# EAGLE board X2 (EAGLE 6.6.0)
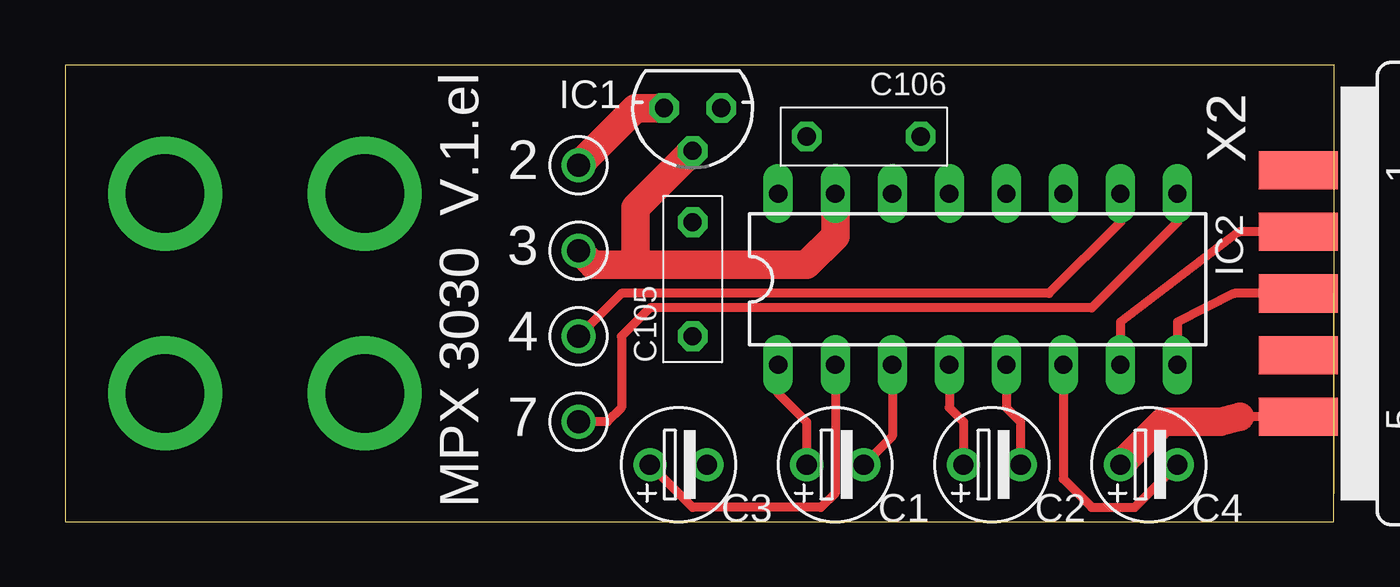
[diagram p0: board, top side]
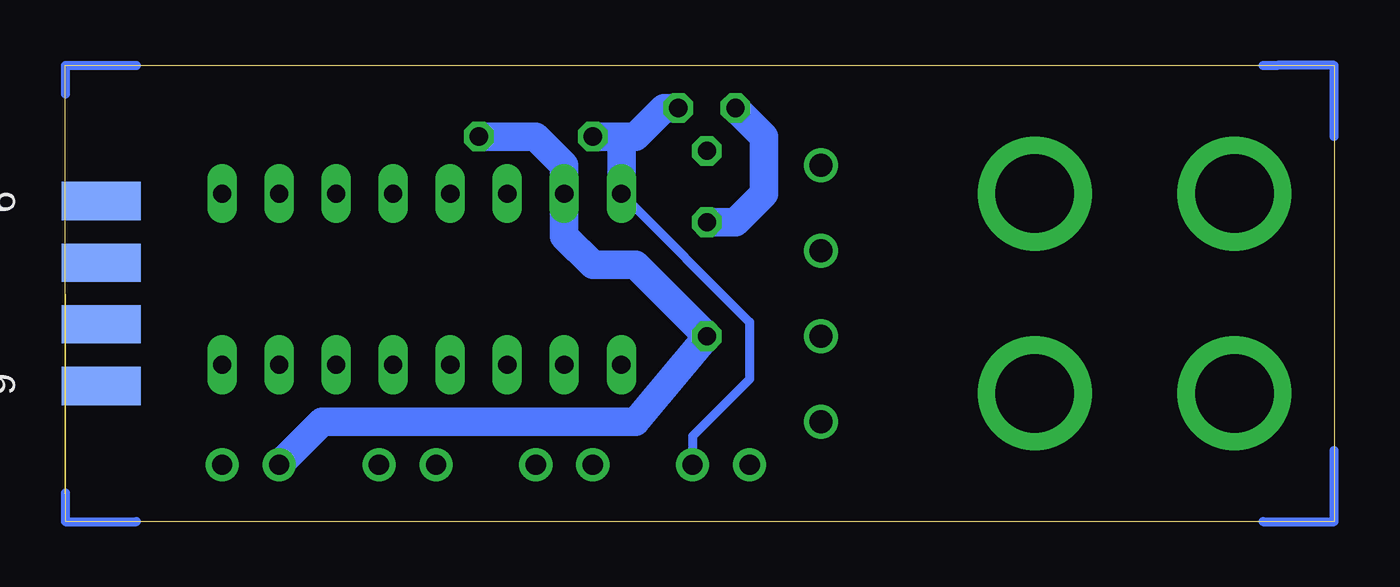
[diagram p1: board, bottom side, seen from below]

Size 56.52 x 20.32 mm. Coordinates in mm from the lower left corner, seen from the top.
Outline: 0,0 56.49,0 56.52,20.32 0,20.32 0,0
Copper layers (1*16): Top 0.035mm / dielectric 1.5mm / Bottom 0.035mm
Design rules "default": minimum track width 10mil, minimum drill 24mil, track to track 8mil, track to pad 8mil, pad to pad 8mil, via to via 8mil, smd to smd 8mil, copper to edge 40mil, drill to drill 8mil, minimum pad ring 10mil, minimum via ring 8mil, stop-mask expansion 4mil, vias tented up to drill 0mil, thermal gap 10mil

## Footprints (pad centres in the part's own frame; a part is rotated, then mirrored left to right if it is on the bottom)
TP_10 = drill 1.016: P$1 0,0
ES-2,5L = drill 0.9 pad 1.473: 1 0,0; 2 2.54,0
C050-025X075 = drill 0.813 octagon: 1 -2.54,0; 2 2.54,0
78LXX = drill 0.813 octagon: GND 0,1.905; IN 1.27,0; OUT -1.27,0
DIL16 = drill 0.813 long: 1 -8.89,-3.81; 2 -6.35,-3.81; 3 -3.81,-3.81; 4 -1.27,-3.81; 5 1.27,-3.81; 6 3.81,-3.81; 7 6.35,-3.81; 8 8.89,-3.81; 9 8.89,3.81; 10 6.35,3.81; 11 3.81,3.81; 12 1.27,3.81; 13 -1.27,3.81; 14 -3.81,3.81; 15 -6.35,3.81; 16 -8.89,3.81
TP_35 = drill 3.5 pad 5.08: TP_35 0,0
F09D = smd 1.7 x 3.5: 1 -5.486,-6.045; 2 -2.743,-6.045; 3 0,-6.045; 4 2.743,-6.045; 5 5.486,-6.045 | smd 1.7 x 3.5 bottom: 6 -4.115,-6.045; 7 -1.372,-6.045; 8 1.372,-6.045; 9 4.115,-6.045

## Placement (x,y rotation side)
2  [TP_10]  22.86,15.88 0 top
3  [TP_10]  22.86,12.06 0 top
4  [TP_10]  22.86,8.26 0 top
7  [TP_10]  22.86,4.45 0 top
C1  1µ  [ES-2,5L]  33.02,2.54 0 top
C2  1µ  [ES-2,5L]  40,2.54 0 top
C3  10µ  [ES-2,5L]  26.04,2.54 0 top
C4  10µ  [ES-2,5L]  46.99,2.54 0 top
C105  [C050-025X075]  27.94,10.79 90 top
C106  [C050-025X075]  35.56,17.14 180 top
IC1  78L05  [78LXX]  27.94,18.41 180 top
IC2  MAX3232CPE  [DIL16]  40.64,10.79 0 top
U$1  [TP_35]  4.45,14.61 0 top
U$2  [TP_35]  13.34,14.61 0 top
U$3  [TP_35]  4.45,5.71 0 top
U$4  [TP_35]  13.34,5.71 0 top
X2  [F09D]  60.96,10.16 270 top

## Library data of the parts
2-4 7 U$1-U$4 = SUPPLY
C1-C4 C105 C106 = R-C
IC1 = v-reg
IC2 = maxim; MF: MAXIM; MPN: MAX3232CPE+; OC_FARNELL: 9724494; OC_NEWARK: 68K4626
X2 = con-subd; OC_FARNELL: unknown; OC_NEWARK: unknown

## Nets
+5V: C3.2 C106.2 IC1.OUT IC2.16
A_CABLE_PIN_7: 7.P$1 IC2.9
A_DSUB: IC2.8 X2.3
B_CABLE_PIN_4: 4.P$1 IC2.10
B_DSUB: IC2.7 X2.2
CABLE_PIN_2: 2.P$1 C105.2 IC1.IN
GND: 3.P$1 C4.1 C105.1 C106.1 IC1.GND IC2.15 X2.5
N$21: C1.1 IC2.1
N$22: C1.2 IC2.3
N$23: C2.1 IC2.4
N$24: C2.2 IC2.5
N$25: C3.1 IC2.2
N$26: C4.2 IC2.6

## Tracks (layer width: path | path; a pad name or v marks a point on that pad's centre or on a via)
+5V
  Bottom 0.406: IC2.16 26.04,8.89 26.04,6.35 28.58,3.81 C3.2
  Bottom 1.27: C106.2 31.75,17.14 | 31.75,17.14 IC2.16 | 31.75,17.14 31.12,17.14 29.84,18.41 IC1.OUT
A_CABLE_PIN_7
  Top 0.406: IC2.9 49.53,13.34 45.72,9.53 26.04,9.53 24.77,8.26 24.77,5.08 24.13,4.45 7.P$1
A_DSUB
  Top 0.406: X2.3 52.07,10.16 49.53,8.89 IC2.8
B_CABLE_PIN_4
  Top 0.406: IC2.10 46.99,13.34 43.81,10.16 24.77,10.16 4.P$1
B_DSUB
  Top 0.406: X2.2 52.27,12.9 46.99,8.89 IC2.7
CABLE_PIN_2
  Top 1.27: 2.P$1 25.4,18.41 IC1.IN
  Bottom 1.27: IC1.IN 25.4,17.14 25.4,14.61 26.67,13.34 C105.2
GND
  Top 0.406: X2.5 52.3,4.67
  Top 1.27: 52.3,4.67 51.44,4.45 48.89,4.45 C4.1 | 3.P$1 23.5,11.43 25.4,11.43 | IC1.GND 25.4,13.97 25.4,11.43 | 25.4,11.43 33.02,11.43 34.29,12.7 IC2.15
  Bottom 1.27: C106.1 35.56,17.14 34.29,15.88 IC2.15 34.29,12.7 33.02,11.43 31.12,11.43 C105.1 31.12,4.45 45.09,4.45 C4.1
N$1  (3 unrouted)
  Bottom 0.406: 0,17.14 0,20.32 2.54,20.32 3.18,20.32 | 0,3.17 0,0 3.18,0 | 53.34,20.32 56.52,20.32 56.52,19.05 | 53.34,0 56.52,0 56.52,1.27
N$21
  Top 0.406: IC2.1 31.75,5.71 33.02,4.45 C1.1
N$22
  Top 0.406: IC2.3 36.83,3.81 C1.2
N$23
  Top 0.406: IC2.4 39.37,5.08 40,4.45 C2.1
N$24
  Top 0.406: IC2.5 41.91,5.08 42.55,4.45 C2.2
N$25
  Top 0.406: IC2.2 34.29,1.27 33.66,0.64 27.94,0.64 C3.1
N$26
  Top 0.406: IC2.6 44.45,1.91 45.72,0.64 47.62,0.64 C4.2

## Text on the board
tNames: 2 | 3 | 4 | 7 | MPX 3030 V.1.el